# Altium PCB breadboardPlugin.PcbDoc
Units mil, origin at the board's own origin, x right, y up, seen from the top; angles counter-clockwise.
Board outline 2047.24 x 984.25 mil, 2 copper layers (Top Layer, Bottom Layer); 68 components, 30 nets, 189 pads, 58 vias.
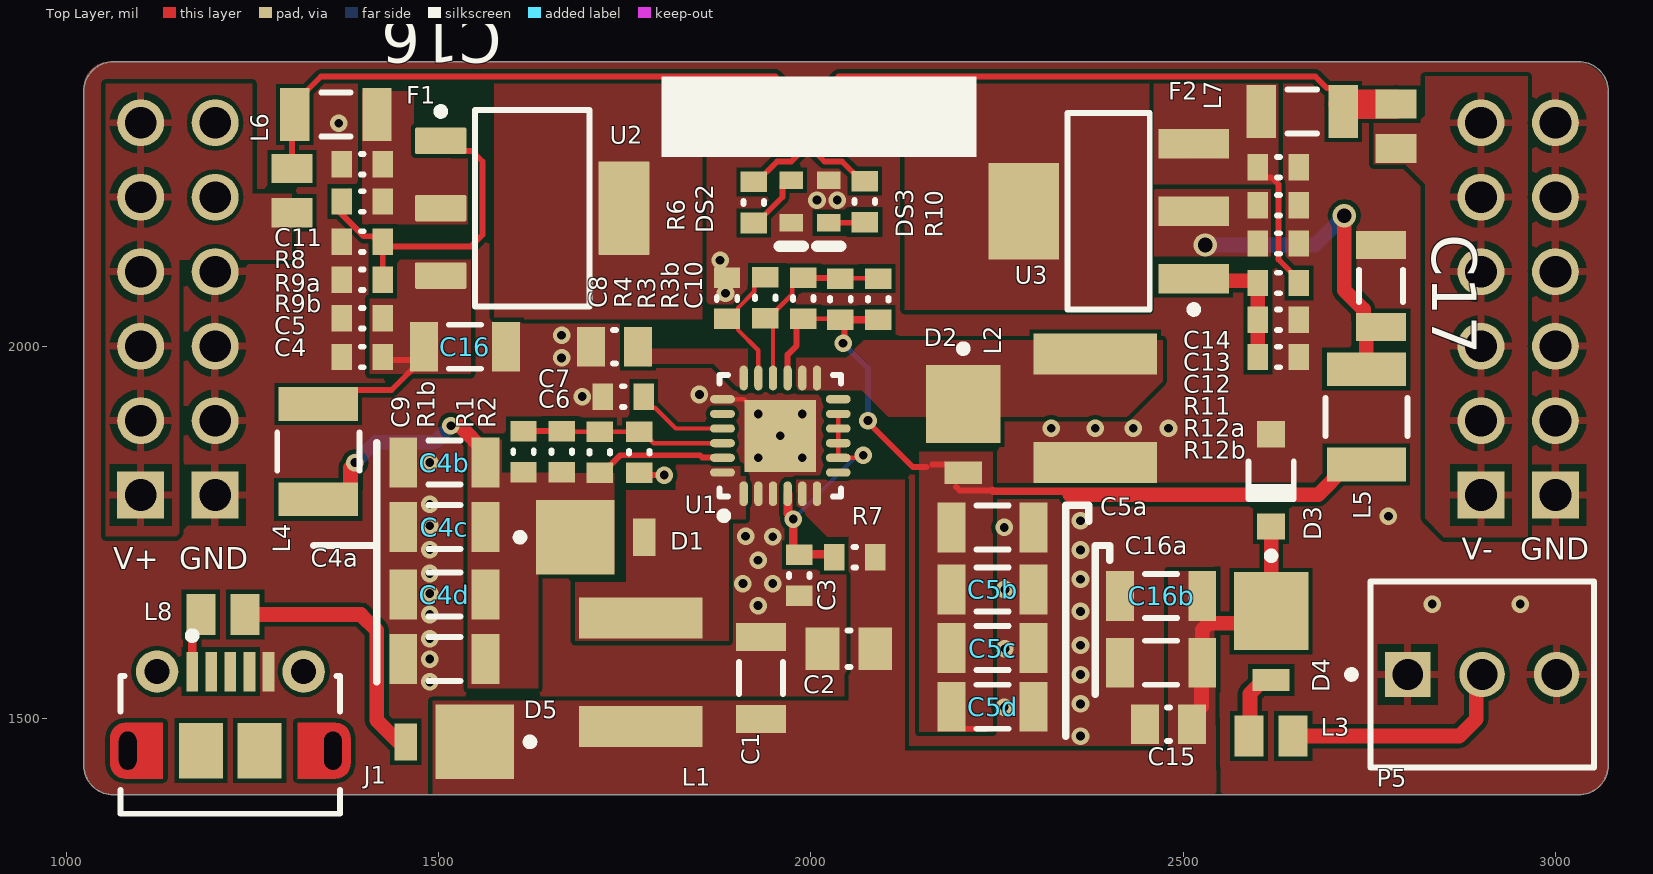
[diagram p0: Top Layer view]
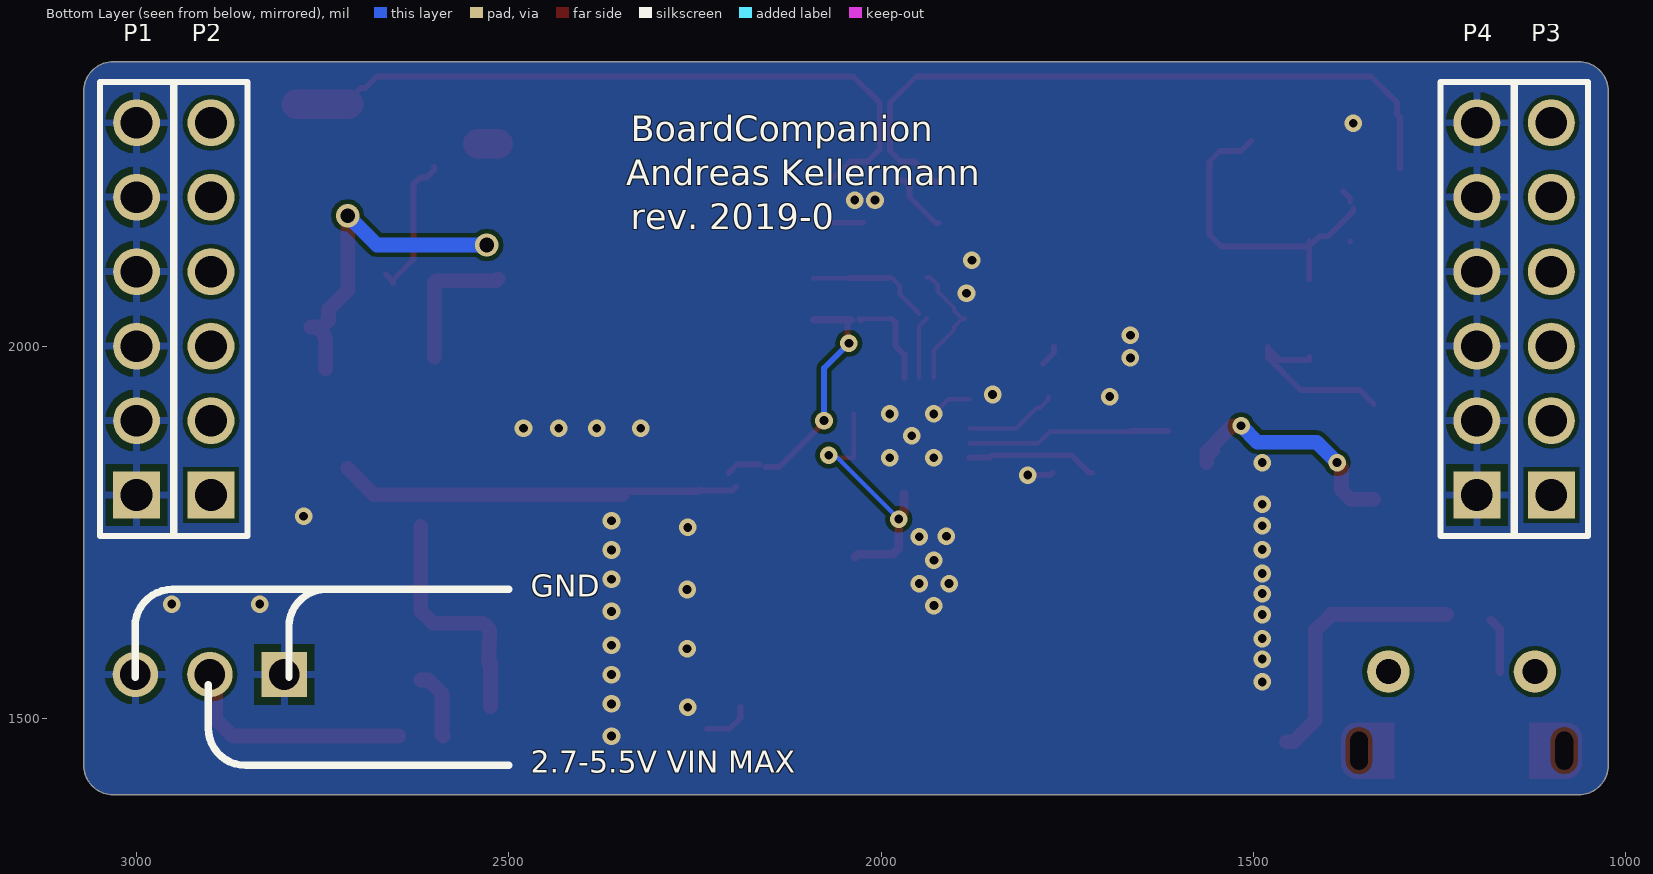
[diagram p1: Bottom Layer view, seen from below]
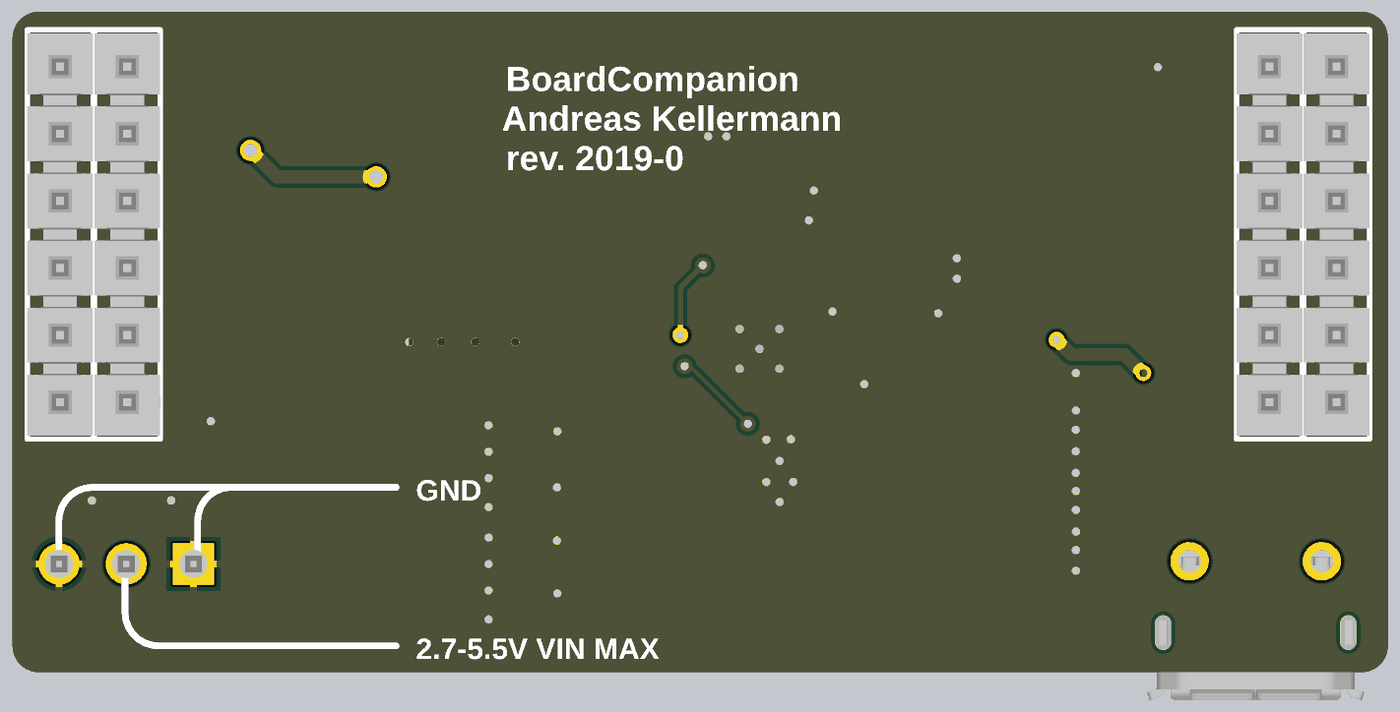
[diagram p2: 3D render of the assembled board from below, using the file's embedded part models]

## Layer stack, top to bottom
Top Solder: solder mask 0.4, Solder Resist, Dk 3.5
Top Layer: signal copper 1.4
Dielectric 1: dielectric 12.6, FR-4, Dk 4.8
Bottom Layer: signal copper 1.4
Bottom Solder: solder mask 0.4, Solder Resist, Dk 3.5

## Board outline
1062.99,1397.64 cw(c1062.99,1437.01) 1023.62,1437.01 1023.62,2342.52 cw(c1062.99,2342.52) 1062.99,2381.89 3031.5,2381.89 cw(c3031.5,2342.52) 3070.87,2342.52 3070.87,1437.01 cw(c3031.5,1437.01) 3031.5,1397.64

## Design rules (kind name [scope] priority, off if disabled: settings)
Clearance [All] p1: gap=5.91 ignorepadtopadclearanceinfootprint=FALSE
PolygonConnect [All] p1: thpad.connectstyle=Relief thpad.reliefconductorwidth=10 thpad.reliefentries=4 thpad.polygonreliefangle="90 Angle" thpad.airgapwidth=10 smdpad.connectstyle=Direct smdpad.reliefconductorwidth=10 smdpad.reliefentries=4 smdpad.polygonreliefangle="90 Angle" smdpad.airgapwidth=10 via.connectstyle=Direct via.reliefconductorwidth=10 via.reliefentries=4 via.polygonreliefangle="90 Angle" via.airgapwidth=10
RoomDefinition RR? [InComponentClass('RR?')] p1: confinementstyle=ConfineIn formatcopy=TRUE lockcomponents=FALSE outline 0,0 2000,0 2000,1000 0,1000
RoomDefinition main [InComponentClass('main')] p2: confinementstyle=ConfineIn formatcopy=TRUE lockcomponents=FALSE outline 3120.07,1466.53 3523.61,1466.53 3523.61,1663.38 3120.07,1663.38
RoutingVias [All] p1: holewidth=28 width=50 viastyle="Through Hole" minholewidth=11.81 minwidth=23.62 maxholewidth=28 maxwidth=50
SolderMaskExpansion [All] p1: expansion=4
Width [All] p1: maxlimit=196.85 minlimit=5.91 preferedwidth=11.81
30 further rules are at their usual default settings.

## Classes and differential pairs
component class RR?: C1 C2 C3 C4a C4b C4c C4d C5a C5b C5c C5d C6 C7 C8 C9 C10 D1 D2 L1 L2 R1 R1b R2 R3 R3b R4 R7 U1
component class main: C4 C5 C11 C12 C13 C14 C15 C16 C16a C16b C17 D3 D4 D5 DS2 DS3 F1 F2 J1 L3 L4 L5 L6 L7 L8 P1 P2 P3 P4 P5 R6 R8 R9a R9b R10 R11 R12a R12b U2 U3

## Components (designator, comment, footprint, x,y, rotation, side; value= is the part's Value field where it differs from the comment)
C1 "4.7uF" CAPC1206(3216)190_L 1933.07,1554.33 r270 top
C2 "4.7uF 0805" CAPC0805(2012)155_N 2051.18,1593.7 r0 top value=4.7uF
C3 "100nF" CAPC0603(1608)100_L 1984.25,1692.13 r90 top
C4 "1uF" CAPC0603(1608)100_L 1397.64,1985.48 r0 top value=100nF
C4a "4.7uF" CAPC1206(3216)190_L 1507.87,1579.76 r0 top
C4b "4.7uF" CAPC1206(3216)190_L 1507.87,1843.54 r0 top
C4c "4.7uF" CAPC1206(3216)190_L 1507.87,1756.92 r0 top
C4d "4.7uF" CAPC1206(3216)190_L 1507.87,1666.37 r0 top
C5 "100nF" CAPC0603(1608)100_L 1397.64,2037.4 r0 top
C5a "4.7uF" CAPC1206(3216)190_L 2244.09,1756.52 r180 top
C5b "4.7uF" CAPC1206(3216)190_L 2244.09,1673.23 r180 top
C5c "4.7uF" CAPC1206(3216)190_L 2244.09,1594.49 r180 top
C5d "4.7uF" CAPC1206(3216)190_L 2244.09,1515.75 r180 top
C6 "10nF" CAPC0603(1608)100_L 1748.03,1932.28 r0 top value=100nF
C7 "4.7nF C0G" CAPC0805(2012)75_L 1736.22,1999.21 r0 top value=4.7nF
C8 "220nF" CAPC0603(1608)100_L 1887.43,2064.14 r270 top
C9 "10pF" CAPC0603(1608)100_L 1614.17,1858.27 r270 top value=220nF
C10 "10pF" CAPC0603(1608)100_L 2090.55,2062.99 r270 top value=220nF
C11 "1uF" CAPC0603(1608)100_L 1397.64,2244.09 r0 top value=100nF
C12 "100nF" CAPC0603(1608)100_L 2627.95,2137.8 r180 top
C13 "1uF" CAPC0603(1608)100_L 2627.95,2189.17 r180 top value=100nF
C14 "1uF" CAPC0603(1608)100_L 2627.95,2240.43 r180 top value=100nF
C15 "MOV" CAPC0805(2012)75_L 2480.31,1492.13 r0 top value=4.7nF
C16 "10uF" CAPC1206(3216)190_L 1535.43,1999.21 r180 top value=4.7uF
C16a "47uF" CAPC1206(3216)190_L 2470.47,1574.8 r0 top value=4.7uF
C16b "47uF" CAPC1206(3216)190_L 2470.47,1664.57 r0 top value=4.7uF
C17 "10uF" CAPC1206(3216)190_L 2765.75,2080.87 r270 top value=4.7uF
D1 "MBRM120LT3" ONSC-POWERMITE-2-457-04_D_V 1736.22,1743.31 r0 top
D2 "MBRM120LT3" ONSC-POWERMITE-2-457-04_D_V 2204.72,1869.85 r270 top
D3 "Q6 - btz52c5v6" DIOD-SOD123-2_V 2618.11,1819.86 r270 top
D4 "MBRM120LT3" ONSC-POWERMITE-2-457-04_D_V 2618.11,1591.68 r270 top
D5 "MBRM120LT3" ONSC-POWERMITE-2-457-04_D_V 1496.06,1468.5 r180 top
DS2 "TLMS1100-GS08" VISH-TLMX1100_V 1973.78,2194.17 r270 top
DS3 "TLMS1100-GS08" VISH-TLMX1100_V 2024.02,2194.17 r270 top
F1 "ptc" LFUS-1206L012WR_V 1362.2,2311.22 r180 top
F2 "ptc" LFUS-1206L012WR_V 2659.84,2314.96 r0 top
J1 "105017-0001" USB-MICRO-B_V 1220.47,1509.84 r0 top
L1 "74404054047" "WE-LQS 5040" 1771.65,1562.2 r90 top
L2 "74404054047" "WE-LQS 5040" 2381.89,1916.54 r90 top
L3 "FBMJ2125HM210NT" INDC2013X105X50LL20T30 2618.11,1476.38 r180 top
L4 "LB3218T1R0M" TDK-B82422A1103K100_V 1338.58,1858.3 r90 top
L5 "LB3218T1R0M" TDK-B82422A1103K100_V 2746.06,1905 r90 top
L6 "FBMJ2125HM210NT" INDC2013X105X50LL20T30 1303.15,2208.86 r90 top
L7 "FBMJ2125HM210NT" INDC2013X105X50LL20T30 2785.83,2295.28 r90 top
L8 "FBMJ2125HM210NT" INDC2013X105X50LL20T30 1210.63,1639.6 r0 top
P1 "PHT-106-01-L-S" SMTC-PHT-106-01-X-S 3000,1800 r90 bottom
P2 "PHT-106-01-L-S" SMTC-PHT-106-01-X-S 2900,1800 r90 bottom
P3 "PHT-106-01-L-S" SMTC-PHT-106-01-X-S 1100,1800 r90 bottom
P4 "PHT-106-01-L-S" SMTC-PHT-106-01-X-S 1200,1800 r90 bottom
P5 "22-23-2031" MOLX-22-23-2031_V 2901.57,1559.06 r0 top
R1 "680k" RESC0603(1608)_L 1716.54,1857.48 r90 top value="100.00 Ohm"
R1b "opt" RESC0603(1608)_L 1665.35,1858.27 r90 top value="100.00 Ohm"
R2 "56k" RESC0603(1608)_L 1769.69,1857.48 r270 top value="100.00 Ohm"
R3 "680k" RESC0603(1608)_L 1989.79,2064.14 r270 top value="100.00 Ohm"
R3b "opt" RESC0603(1608)_L 2039.76,2062.95 r270 top value="100.00 Ohm"
R4 "56k" RESC0603(1608)_L 1938.61,2064.92 r270 top value="100.00 Ohm"
R6 "3.3k" RESC0603(1608)_L 1923.23,2192.91 r270 top value="100.00 Ohm"
R7 "100R" RESC0603(1608)_L 2059.06,1716.54 r0 top value="100.00 Ohm"
R8 "150" RESC0603(1608)_L 1397.64,2194.21 r180 top value="100.00 Ohm"
R9a "1.5k" RESC0603(1608)_L 1397.64,2140.43 r180 top value="100.00 Ohm"
R9b "opt" RESC0603(1608)_L 1397.64,2089.17 r180 top value="100.00 Ohm"
R10 "3.3k" RESC0603(1608)_L 2072.22,2194.17 r270 top value="100.00 Ohm"
R11 "150" RESC0603(1608)_L 2627.95,2084.81 r180 top value="100.00 Ohm"
R12a "1.5k" RESC0603(1608)_L 2627.95,1985.48 r0 top value="100.00 Ohm"
R12b "opt" RESC0603(1608)_L 2627.95,2035.59 r0 top value="100.00 Ohm"
U1 "TPS6513x" TI-RGE24-2450X2450TP_V 1959.06,1879.53 r90 top locked
U2 "LM317AEMP" DCY0004A_N 1625.98,2185.24 r0 top
U3 "LM337IMPX" MP04A_N 2400,2181.1 r180 top

## Footprints (in the part's own frame and the unit in brackets; to place one, negate y for a bottom-side part, rotate by r counter-clockwise, add the part's x,y. Pads: shape width x height; smd on the part's side, far side on the other; paste and mask are expansions set on the pad)
CAPC0603(1608)100_L [mm] "Chip Capacitor, Body 1.6x0.8mm, Height 1.0mm, IPC High Density"
  rect 0.7x0.9 smd: 1(-0.7,0) 2(0.7,0)
  silkscreen extent -0.05,-0.35 0.05,0.35, body extent -0.87,-0.47 0.88,0.48, height 1
CAPC0805(2012)75_L [mm] "Chip Capacitor, Body 2.0x1.2mm, Height 0.75mm, IPC High Density"
  rect 0.95x1.35 smd: 1(-0.8,0) 2(0.8,0)
  silkscreen extent -0.05,-0.58 0.05,0.58, body extent -1.1,-0.72 1.1,0.72, height 0.75
CAPC0805(2012)155_N [mm] "Chip Capacitor, Body 2.0x1.2mm, Height 1.55mm, IPC Medium Density"
  rect 1.15x1.45 smd: 1(-0.9,0) 2(0.9,0)
  silkscreen extent -0.05,-0.62 0.05,0.63, body extent -1.1,-0.72 1.1,0.73, height 1.55
CAPC1206(3216)190_L [mm] "Chip Capacitor, Body 3.2x1.6mm, Height 1.9mm, IPC High Density"
  rect 0.95x1.7 smd: 1(-1.4,0) 2(1.4,0)
  silkscreen extent -0.55,-0.75 0.55,0.75, body extent -1.7,-0.9 1.7,0.9, height 1.9
DCY0004A_N [mm] "SOT223, 4-Leads, Body 6.7x3.7mm, Pitch 2.3mm, IPC Medium Density"
  rrect11% 1.75x0.9 smd: 1(-3.125,2.3) 2(-3.125,0) 3(-3.125,-2.3)
  rrect6% 1.75x3.2 smd: 4(3.125,0)
  silkscreen extent -3.25,-3.35 1.95,3.42, body extent -3.5,-3.25 3.5,3.25, height 1.62
DIOD-SOD123-2_V [mm] "SOD123, 2-Leads, Body 2.7x1.55mm, Height 1.45mm"
  rect 0.9x0.95 smd: 1(-1.575,0) 2(1.575,0)
  silkscreen extent -0.64,-0.83 0.64,0.77, body extent -1.35,-0.77 1.35,0.77, height 1.45
INDC2013X105X50LL20T30 [mm] "Chip Inductor, 2-Leads, Body 2.2x1.45mm, IPC High Density"
  rect 0.99x1.39 smd: 1(-0.755,0) 2(0.755,0)
  body extent -1.1,-0.72 1.1,0.72, height 1.05
LFUS-1206L012WR_V [mm] "SMD, 2-Leads, Body 3.2x1.65mm"
  rect 1x1.8 smd: 1(-1.4,0) 2(1.4,0)
  silkscreen extent -0.5,-0.75 0.5,0.75, body extent -1.6,-0.82 1.6,0.82, height 1.45
MOLX-22-23-2031_V [mm] "CONN, 3-Leads, Body 7.62x6.35mm, Pitch 2.54mm"
  rect 1.55x1.55 hole 1.05: 1(-2.54,0)
  round 1.55 hole 1.05: 2(0,0) 3(2.54,0)
  silkscreen extent -4.58,-3.17 3.81,3.17, body extent -3.73,-3.25 3.73,3.1, height 10.67
MP04A_N [mm] "SOT223, 4-Leads, Body 6.5x3.5mm, Pitch 2.3mm, Lead Span 7mm, IPC Medium Density"
  rect 2.4x1 smd: 1(-2.9,2.3) 2(-2.9,0) 3(-2.9,-2.3)
  rect 2.4x3.3 smd: 4(2.9,0)
  silkscreen extent -3.03,-3.35 1.4,3.47, body extent -1.86,-3.35 1.86,3.35, height 1.8
ONSC-POWERMITE-2-457-04_D_V [mil] "POWERMITE, 2-Leads, Body 1.965x1.9mm"
  rect 105.12x100 smd: 1(-52.56,0)
  rect 30x50 smd: 2(40,0)
  silkscreen extent -132,-5 -122,5, body extent -80,-37 -3,37, height 45
RESC0603(1608)_L [mm] "Chip Resistor, Body 1.6x0.8mm, IPC High Density"
  rect 0.7x0.9 smd: 1(-0.7,0) 2(0.7,0)
  silkscreen extent -0.05,-0.35 0.05,0.35, body extent -0.85,-0.47 0.85,0.47, height 0.6
SMTC-PHT-106-01-X-S [mm] "Press Fit Socket Assembly, 1x6 Pins, Vertical, 2.54mm Pitch, Male"
  rect 1.6x1.6 hole 1.081: 1(0,0)
  round 1.6 hole 1.081: 2(2.54,0) 3(5.08,0) 4(7.62,0) 5(10.16,0) 6(12.7,0)
  silkscreen extent -1.4,-1.24 14.1,1.24, body extent -1.26,-1.25 13.96,1.25, height 8.38
TDK-B82422A1103K100_V [mm] "Molded Inductor, 2-Leads, Body 3.5x2.8mm"
  rect 1.15x2.7 smd: 1(-1.625,0) 2(1.625,0)
  silkscreen extent -0.65,-1.4 0.65,1.4, body extent -1.97,-1.4 1.97,1.4, height 2.1
TI-RGE24-2450X2450TP_V [mm] "QFN, 24-Leads, Body 4x4mm, Pitch 0.5mm, Thermal Pad 2.45x2.45mm"
  oval 0.85x0.28 smd: 1(-1.975,1.25) 2(-1.975,0.75) 3(-1.975,0.25) 4(-1.975,-0.25) 5(-1.975,-0.75) 6(-1.975,-1.25) 13(1.975,-1.25) 14(1.975,-0.75) 15(1.975,-0.25) 16(1.975,0.25) 17(1.975,0.75) 18(1.975,1.25)
  oval 0.28x0.85 smd: 7(-1.25,-1.975) 8(-0.75,-1.975) 9(-0.25,-1.975) 10(0.25,-1.975) 11(0.75,-1.975) 12(1.25,-1.975) 19(1.25,1.975) 20(0.75,1.975) 21(0.25,1.975) 22(-0.25,1.975) 23(-0.75,1.975) 24(-1.25,1.975)
  rect 2.45x2.45 smd: 25(0,0)
  silkscreen extent -2.85,-2.07 2.07,2.07, body extent -2,-2 2,2, height 1
USB-MICRO-B_V [mm] "USB, MICRO B, Body 7.491x4.695 mm, Pitch 0.65 mm"
  rect 0.4x1.35 smd: 1(-1.3,1.35) 2(-0.65,1.35) 3(0,1.35) 4(0.65,1.35) 5(1.3,1.35)
  round 1.45 hole 0.85: 6(-2.5,1.35) 7(2.5,1.35)
  rrect50% 0x0 hole 0.6 slot 1.3 at 90 deg: 8(-3.5,-1.35) 11(3.5,-1.35)
  rect 1.5x1.9 smd: 9(-1,-1.35) 10(1,-1.35)
  Top Layer circle w0.5: c-3.6,-1.8 r0.25
  Top Layer circle w0.5: c-3.6,-0.9 r0.25
  Top Layer circle w0.5: c3.6,-1.8 r0.25
  Top Layer circle w0.5: c3.6,-0.9 r0.25
  Top Layer region: -3.6,-1.8 -3.6,-0.9 -4.1,-0.9 -4.1,-1.8
  Top Layer region: 3.6,-0.9 3.6,-1.8 4.1,-1.8 4.1,-0.9
  Top Layer region: 2.3,-0.4 2.3,-2.3 3.6,-2.3 3.6,-0.4
  Top Layer region: -2.3,-2.3 -2.3,-0.4 -3.6,-0.4 -3.6,-2.3
  silkscreen extent -3.75,-3.5 3.75,2.7, body extent -4.1,-3.9 4.1,1.5, height 2.67
VISH-TLMX1100_V [mm] "SMD, 2-Leads, Body 1.6x0.8mm"
  rect 0.6x0.8 smd: 1(-0.725,0) 2(0.725,0)
  silkscreen extent 1.53,-0.4 1.53,0.4, body extent -0.8,-0.4 0.8,0.4, height 0.65
"WE-LQS 5040" [mm] "SMD Power Inductor, 2-Leads, Body 5.0x5.0mm"
  rect 1.4x4.2 smd: 1(-1.85,0) 2(1.85,0)
  body extent -2.5,-2.5 2.5,2.5, height 3.99

## Part data
C1 C4a C4b C4c C4d C5a C5b C5c C5d C16 C17: library part CMP-1037-04919-1, "CAP 4.7uF 25V ±20% 1206 (3216 Metric) Thickness 1.9mm SMD", Case-EIA=1206, Case-Metric=3216, Rated Voltage="25 V", Tolerance=±20%, Max Thickness="1.9 mm", Technology=SMT
C2: library part CMP-1036-04882-1, "CAP 4.7uF 10V ±10% 0805 (2012 Metric) Thickness 1.55mm SMD", Case-EIA=0805, Case-Metric=2012, Rated Voltage="10 V", Tolerance=±10%, Max Thickness="1.55 mm", Technology=SMT
C3 C5 C6 C12: library part CMP-1035-02589-1, "CAP 100nF 25V ±20% 0603 (1608 Metric) Thickness 1mm SMD", Case-EIA=0603, Case-Metric=1608, Rated Voltage="25 V", Tolerance=±20%, Max Thickness="1 mm", Technology=SMT
C4 C11 C13 C14: library part CMP-1035-02589-1, "CAP 1uF 25V ±20% 0603 (1608 Metric) Thickness 1mm SMD", Case-EIA=0603, Case-Metric=1608, Rated Voltage="25 V", Tolerance=±20%, Max Thickness="1 mm", Technology=SMT
C7: library part CMP-1036-03595-1, "CAP 4.7nF 50V ±20% 0805 (2012 Metric) Thickness 0.75mm SMD", Case-EIA=0805, Case-Metric=2012, Rated Voltage="50 V", Tolerance=±20%, Max Thickness="0.75 mm", Technology=SMT
C8: library part CMP-1035-02639-1, "CAP 220nF 10V ±5% 0603 (1608 Metric) Thickness 1mm SMD", Case-EIA=0603, Case-Metric=1608, Rated Voltage="10 V", Tolerance=±5%, Max Thickness="1 mm", Technology=SMT
C9 C10: library part CMP-1035-02639-1, Case-EIA=0603, Case-Metric=1608, Rated Voltage="10 V", Tolerance=±5%, Max Thickness="1 mm", Technology=SMT
C15: library part CMP-1036-03595-1, "MOV 0805", Case-EIA=0805, Case-Metric=2012, Rated Voltage="50 V", Tolerance=±20%, Max Thickness="0.75 mm", Technology=SMT
C16a C16b: library part CMP-1037-04919-1, "CAP 47uF 10V ±20% 1206 X5R", Case-EIA=1206, Case-Metric=3216, Rated Voltage="25 V", Tolerance=±20%, Max Thickness="1.9 mm", Technology=SMT
D1 D2 D4 D5: library part CMP-1055-00282-1, "Schottky Power Rectifier, 2-Pin Powermite, Tape and Reel", Manufacturer="On Semiconductor", ComponentLink1Description="Manufacturer URL", ComponentLink1URL=http://www.onsemi.com/, ComponentLink2Description=Datasheet, ComponentLink2URL=http://www.onsemi.cn/pub_link/Collateral/MBRM120L-D.PDF, ComponentLink3Description="Package Specification", ComponentLink3URL=http://www.onsemi.com/pub_link/Collateral/457-04.PDF, Configuration=Single, DatasheetVersion="Rev. 7", IFSM Max (A)=50, Mounting Technology="Surface Mount", Note1=0, PackageDescription="2-Pin POWERMITE, Body 1.965 x 1.9 mm", PackageReference=POWERMITE-2-457-04, PackageVersion="Rev. F, 05/2013", Packing="Tape and Reel", PartNumber=MBRM120LT3, RoHS=FALSE
D3: library part CMP-0860-00001-1, "Zener Diode 500mw, 5.6v", Manufacturer="Diodes Inc", Maximum Reverse Current="0.1 uA", Operating Temperature="-65 to 150 degC", PartNumber=BZT52C16-7-F, Power Max="500 mW", Voltage Zener="16 V Typ.", ComponentLink1Description="Manufacturer URL", ComponentLink1URL=http://www.diodes.com/, ComponentLink2Description=Datasheet, ComponentLink2URL=http://www.diodes.com/datasheets/ds18004.pdf, ComponentLink3Description="Package Specification", ComponentLink3URL=http://www.diodes.com/datasheets/ap02002.pdf, DatasheetVersion="Rev. 37-2", Maximum Zener Impedance f="1 kHz ZZK=200 Ohm", Mounting Technology="Surface Mount", PackageDescription="2-Pin SOD123, Body 2.7 x 1.55 mm, Height 1.45 mm", PackageReference=SOD123, PackageVersion="Rev. 79", Packing="Tape and Reel", RoHS=TRUE, Tol V="5.56% Typ."
DS2 DS3: library part CMP-1666-00027-1, "LED, RED, 2.1 V, -40 to 100 degC, 2-Pin SMD (0603), RoHS, Tape and Reel", Capacitance="12 pF", Case/Package=0603, Case Code (Metric)=1608, Max Operating Temperature=125degC, Min Operating Temperature=-55degC, Package Quantity=4000, Resistance="100000000000 Ohm", Tolerance=5%, Type (Capacitors)=C0G, Voltage Rating="50 V", Case Code (Imperial)=0603, ComponentLink1Description="Manufacturer URL", ComponentLink1URL=http://www.vishay.com/, ComponentLink2Description=Datasheet, ComponentLink2URL=http://www.vishay.com/docs/83173/tlmb1100.pdf, DatasheetVersion="Rev. 2.7, 03/2016", Height="0.8 mm", Length="1.6 mm", Mount="Surface Mount", PackageDescription="2-Pin Surface Mount Device, Body 1.6 x 0.8 mm", PackageReference=TLMX1100, Packaging="Tape and Reel", Pins=2, Radiation Hardening=No, REACH SVHC="No SVHC", RoHSCompliant=True, Voltage Rating (DC)="50 V", Width="0.8 mm"
F1 F2: library part CMP-2000-05470-1, "200mA PTC", Hold Current [Ih]=0.125A, Manufacturer=Littelfuse, Operating Temp Range=-40to+85°C, Package Description="2-Pin Surface Mount Device, Body 3.2 x 1.65 mm", Package Reference=1206, Trip Current=0.29A, Working Voltage-Max=30V, Datasheet URL=https://datasheet.ciiva.com/26787/1206l012wr-26787215.pdf, Datasheet Version=04/2012, Manufacturer URL=http://www.littelfuse.com/, Mounting Technology=SurfaceMount, Size=1206
J1: library part CMP-2000-05827-1, "Micro-USB B Receptacle, Right Angle, Bottom Mount, Surface Mount, with Solder Tabs, -30 to 85 degC, 5-Pin USB, RoHS, Tape and Reel", Manufacturer=Molex, Package Description="5-Leads USB, Micro B, Body 7.5 x 5 mm, Pitch 0.65 mm", Package Reference=MICRO-B, Package Version="Rev. F, 12/2012", Standard Package=1, Voltage - Max=30V, 3D Model=105017-0001.stp, Catalog Drawings=1050170001, Category=Connectors,Interconnects, Circuits=5, Connector Type=USB-microB, Datasheet URL=http://www.molex.com/elqNow/elqRedir.htm?ref=http://www.molex.com/webdocs/datasheets/pdf/en-us/1050170001_IO_CONNECTORS.pdf, Datasheet Version=03/2016, Family=USB,DVI,HDMIConnectors, Featured Product=Micro-USBConnectorsUSBConnectors, Features=Shielded,SolderRetention, Gender=Receptacle, Ingress Protection=-, Manufacturer URL=http://www.molex.com/, Mating Products=WM17145-ND-CABLEMICROUSBBTOSTDA1.0MWM17147-ND-CABLEMICROUSBBTOSTDA2.0MWM17146-ND-CABLEMICROUSBBTOSTDA1.5M, Mounting Technology=SurfaceMount, Mounting Type=BoardCutout,SurfaceMount,RightAngle, Number of Contacts=5, Online Catalog=Molex-MicroUSB, Other Names=WM1399DKR, Package URL=http://www.molex.com/pdm_docs/sd/1050170001_sd.pdf, Packaging=Digi-Reel®, PCN Assembly/Origin=ResinSupplier21/Oct/2015, RoHS Information=1050170001CertofCompliance, Series=-, Specifications=-
L1 L2: library part CMP-1354-00047-1, "WE-LQS SMD Power Inductor, L=4.7 µH", Inductance="4.7 µH", Manufacturer="Wuerth Elektronik", ComponentLink1Description="Manufacturer URL", ComponentLink1URL=http://www.we-online.com, ComponentLink2Description=Datasheet, ComponentLink2URL=http://katalog.we-online.de/pbs/datasheet/74404054047.pdf, PackageReference="WE-LQS 5040", PartNumber=74404054047
L3 L6 L7 L8: library part CMP-1660-00003-1, "Chip Inductor, 21 Ohm, +/- 30%, 6 A, -40 to 125 degC, 0805 (2012 Metric), RoHS, Tape and Reel", Case\Package=0805, Case Code (Metric)=2012, Current Rating="6 A", Max Operating Temperature="125 degC", Min Operating Temperature="-40 degC", Package Quantity=1, Resistance="4 mohm", Tolerance=30%, Case Code (Imperial)=0805, ComponentLink1Description="Manufacturer URL", ComponentLink1URL=http://www.t-yuden.com/, ComponentLink2Description=Datasheet, ComponentLink2URL=http://ds.yuden.co.jp/TYCOMPAS/ut/detail.do?productNo=FBMJ2125HM210NT&fileName=FBMJ2125HM210NT_SS&mode=specSheetDownload, Core Material=Ferrite, DatasheetVersion=08/2016, Height="0.85 mm", Impedance="21 Ohm", Length="2 mm", Max Current Rating="6 A", Mount="Surface Mount", Mounting Technology="Surface Mount", PackageDescription="2-Pin Surface Mount Device, Body 2 x 1.25 mm", PackageReference=0805, Packaging="Tape and Reel", REACH SVHC=Unknown, RoHSCompliant=true, Width="1.25 mm"
L4 L5: library part CMP-2000-05912-1, "FIXED IND 1UH 1.075A 60 MOHM SMD", Current - Saturation=-, Current Rating=180mA, DC Resistance (DCR)=1.6OhmMax, Frequency - Self Resonant=25MHz, Frequency - Test=1MHz, Inductance=10µH, Manufacturer=EPCOS-(TDK), Package / Case=1210(3225Metric), Package Description="2-Pin Surface Mount Device, Body 3.2 x 2.5 mm", Package Reference=B82422A1103K100, Q @ Freq=27@2.52MHz, Ratings=AEC-Q200, Tolerance=±10%, Category=Inductors,Coils,Chokes, Datasheet URL=https://en.tdk.eu/inf/30/db/ind_2008/b82422a_100.pdf, Datasheet Version=10/2012, Family=FixedInductors, Manufacturer URL=http://www.tdk.com/, Material - Core=Ferrite, Mounting Technology=SurfaceMount, Mounting Type=SurfaceMount, Operating Temperature=-, Packaging=CutTape(CT), Series=SIMID, Shielding=Unshielded, Type=Wirewound
P1 P2 P3 P4: library part CMP-1024-00187-1, "Press Fit Header, Through-hole, Vertical, -55 to 125 degC, 2.54 mm Pitch, 6-Pin, Male, RoHS", Manufacturer=Samtec, Temperature Range="-55 to 125 degC", ComponentLink1Description="Manufacturer URL", ComponentLink1URL=http://www.samtec.com, ComponentLink2Description=Datasheet, ComponentLink2URL=http://www.samtec.com/documents/webfiles/pdf/pht.pdf, ComponentLink3Description="Package Specification", ComponentLink3URL=http://www.samtec.com/documents/webfiles/cpdf/PHT-1XX-XX-X-X-XXX-MKT.pdf, DatasheetVersion=F-214, Mounting Technology=Through-hole, Orientation=Vertical, PackageDescription=".100 Press Fit Socket Assembly", PackageReference=PHT-106-01-X-S, PackageVersion="J, 9/2009", PartNumber=PHT-106-01-L-S, Pitch="2.54 mm", RoHS=True
P5: library part CMP-2000-05242-1, "Male Header, Pitch 2.54 mm, 1 x 3 Position, Height 8.18 mm, Tail Length 3.56 mm, RoHS, Bulk", Current Rating=4A, Manufacturer=Molex, Voltage Rating=250V, =0022232031A-6373-03A102, Brand=Molex, Contact Gender=Pin(Male), Contact material=Brass, Contact Plating=Tin, Datasheet URL=https://datasheet.ciiva.com/19472/232274-19472863.pdf, Datasheet Version=Sep-01, Factory Pack Quantity=16000, Housing material=Nylon, Manufacturer URL=http://www.molex.com/, Mounting Angle=Vertical, Mounting Style=ThroughHole, Number of Positions=3Position, Number of Rows=1Row, Packaging=Bulk, Pitch=2.54mm, Product=Headers, Product Category=Headers&WireHousings, RoHS=Details, Series=6373, Termination Style=ThroughHole, Tradename=KK, Type=Locking
R1 R1b R2 R3 R3b R4 R6 R8 R9a R9b R10 R11 R12a R12b: library part CMP-1012-00397-1, Case-EIA=0603, Case-Metric=1608, Power="0.1 W", Tolerance="1 %", Technology=SMT
R7: library part CMP-1012-00397-1, "100R 0.1W 1% 0603 (1608 Metric)  SMD", Case-EIA=0603, Case-Metric=1608, Power="0.1 W", Tolerance="1 %", Technology=SMT
U1: library part CMP-0388-00544-1, "TPS65130 or TPS65131 Postive and Negative Output DC-DC Converter", Manufacturer="Texas Instruments", PartNumber=TPS65130RGET, Rating=Catalog, Switching Frequency(Typ)(kHz)=1400, Code_JEDEC=MO-220, ComponentLink1Description="Manufacturer URL", ComponentLink1URL=http://www.ti.com/, ComponentLink2Description=Datasheet, ComponentLink2URL=http://www.ti.com/general/docs/lit/getliterature.tsp?genericPartNumber=TPS65130&fileType=pdf, ComponentLink3Description="Package Specification", ComponentLink3URL=http://www.ti.com/litv/pdf/mpqf124f, DatasheetVersion=SLVS493B, Eco-Plan="Green (RoHS & no Sb/Br)", Iq(Typ)(mA)=0.5, Mounting Technology="Surface Mount", PackageDescription="24-Pin Plastic Flat Pack, Body 4 x 4 mm, 0.5 mm Pitch", PackageReference=RGE24-2450X2450TP, PackageVersion=4204104/G, SubFamily="LCD/OLED Display Bias Solutions", Topology="Boost, Inverting Buck/Boost", Vin(Max)(V)=5.5, Vin(Min)(V)=2.7
U2: library part CMP-0062-01709-3, "3-Terminal Adjustable Regulator, 4-pin SOT-223", Manufacturer="Texas Instruments", PackageTopMarking=XYTT*N07A, PowerWise=N, Code_IPC=SOT223-4, Code_JEDEC=TO-261-AA, ComponentLink1Description="Datasheet URL", ComponentLink1URL=http://www.ti.com/general/docs/lit/getliterature.tsp?genericPartNumber=LM317-N&fileType=pdf, CompType="LDO IC", PackageDescription="Molded SOT-223, 6.50 x 3.56 x 1.6mm Body, 4 Lead, 2.3mm Pitch", PackageReference=DCY0004A, PinCount=4, RoHS=N
U3: library part CMP-0062-01833-1, "3-Terminal Adjustable Negative Regulator, 4-pin SOT-223", Manufacturer="National Semiconductor", PackageTopMarking=XYTT*N02A, PowerWise=N, Code_IPC=SOT223-4, Code_JEDEC=TO-261-AA, CompType="LDO IC", DatasheetVersion=Nov-2004, PackageDescription="Molded SOT-223, 6.50 x 3.56 x 1.6mm Body, 4 Lead, 2.3mm Pitch", PackageReference=MP04A, PackageVersion="revB, Apr-2003", PinCount=4, RoHS=N

## Via types
v1: diameter 23.62, hole 11.81, Top Layer to Bottom Layer, tented both sides, 53 vias
v2: diameter 23.62, hole 11.81, Top Layer to Bottom Layer, 3 vias
v3: diameter 31.5, hole 19.68, Top Layer to Bottom Layer, 2 vias

## Nets (pads, with @x,y where several pads share a name; then routed paths per layer and width w, separated by ;. In a path a pad name is that pad's centre, name@x,y a point inside that pad or via, vN(x,y) a via of type N, cw(c..) or ccw(c..) an arc to the next point about the centre after c; other vN are vias at no path point)
+12V: C4a.2 C4b.2 C4c.2 C4d.2 C9.2 D1.1 L4.1 R1.1 R1b.1 U1.23 | length 509.2
  Top Layer w7.87: C4b.2@1548.23,1858.3 C4b.2 ; R1.1 1720.47,1829.92 1744.09,1853.54 1851.18,1853.54 1854.12,1850.6 1880.7,1850.6 U1.23
  Top Layer w19.68: L4.1 1369.09,1794.32 1381.89,1807.12 1381.89,1836.57 1387.8,1842.47 v2(1387.8,1843.54) ; v2(1516.73,1892.99) 1528.3,1892.99 1562.99,1858.3 C4b.2
  Bottom Layer w19.68: v2(1387.8,1843.54) 1415.35,1871.1 1494.84,1871.1 v2(1516.73,1892.99)
-12V: C5a.2 C5b.2 C5c.2 C5d.2 C10.2 D2.2 L5.1 R3.2 R3b.2 U1.15 | length 1104.5
  Top Layer w5.91: R3.2@1985.85,2036.58 R3.2 R3b.2@2029.16,2036.58
  Top Layer w7.87: U1.15 1968.9,1988.58 1981,2000.69 1981,2031.73 R3.2@1985.85,2036.58 ; R3b.2@2027.19,2034.61 R3b.2@2029.16,2036.58 ; v1(2043.31,2003.94) 2045.28,2005.91 R3b.2@2045.28,2035.4 ; v2(2076.77,1900) 2076.77,1897.9 2137.15,1837.52 2155.51,1837.52 ; 2163.03,1840.91 2193.66,1840.91 D2.2 ; C5d.2 2188.98,1500.98 2203.74,1486.22 2234.25,1486.22 ; 2194.88,1811.02 2199.61,1806.3 2244.09,1806.3
  Top Layer w9.84: R3b.2 C10.2@2090.53,2035.41 ; 2244.09,1806.3 2245.08,1805.32 2347.91,1805.32 2362.2,1805.32
  Top Layer w19.68: 2347.91,1800.39 2362.2,1800.39 2681.11,1800.39 L5.1@2716.54,1835.82
  Bottom Layer w7.87: v1(2043.31,2003.94) 2076.77,1970.47 v2(2076.77,1900)
CT1: U2.4
CT2: U3.4
GND: C1.1 C2.1 C3.1 C4.1 C4a.1 C4b.1 C4c.1 C4d.1 C5.1 C5a.1 C5b.1 C5c.1 C5d.1 C6.1 C7.1 C8.1 C11.1 C12.1 C13.1 C14.1 C15.1 C16.1 C16a.1 C16b.1 C17.1 D3.1 DS2.2 DS3.1 J1.5 L2.1 P1.1 P1.2 P1.3 P1.4 P1.5 P1.6 P4.1 P4.2 P4.3 P4.4 P4.5 P4.6 P5.1 P5.3 R2.2 R9a.2 R9b.2 R12a.2 R12b.2 U1.2 U1.3 U1.19 U1.25 | length 91.2
  Top Layer w5.91: U1.19 1909.84,1928.74 v1(1929.53,1909.06)
  Top Layer w7.87: R2.2 1772.83,1826.77 v1(1803.15,1826.77)
  other v1: 2362.2,1476.38 2259.84,1515.18 2362.2,1519.49 1488.19,1549.05 2362.2,1558.86 1488.19,1579.76 2260.63,1593.7 2362.2,1598.23 1488.19,1607.32 1488.19,1639.6 2362.2,1643.7 1929.13,1651.57 2834.64,1653.54 2952.76,1653.54 1488.19,1667.74 2260.63,1673.23 1908.81,1681.1 1948.82,1681.1 2362.2,1686.81 1488.19,1694.72 1929.13,1712.6 2362.2,1726.18 1488.19,1726.82 1948.82,1744.09 1912.45,1744.68 2259.84,1756.52 1488.19,1758.9 2362.2,1765.55 2775.59,1771.65 1488.19,1787.75 1488.19,1843.54 1929.53,1850 1988.58,1850 1959.06,1879.53 2322.83,1889.76 2381.89,1889.76 2433.07,1889.76 2480.31,1889.76 1988.58,1909.06 1692.91,1932.28 1850.39,1935.04 1665.35,1984.25 1665.35,2014.57 1885.46,2071.03 1878.18,2115.45 2008.27,2196.14 2035.43,2196.14 1366.14,2299.21
NetC1_2: C1.2 C2.2 C15.2 C16a.2 C16b.2 D3.2 D4.1 D5.1 L1.1 R7.2 U1.5 U1.6 | length 318.3
  Top Layer w19.68: C15.2@2524.61,1515.75 C16a.2@2524.61,1574.8 ; C16a.2@2525.59,1604.33 2525.59,1619.09 2534.45,1627.95 2601.82,1627.95 D4.1 D3.2 ; C16a.2@2526.57,1603.35 2526.57,1576.77 C16a.2@2527.56,1575.79
NetC3_2: C3.2 R7.1 U1.4 U1.8 U1.9 U1.10 U1.11 | length 364.2
  Top Layer w5.91: 1976.38,1755.91 v1(1976.38,1767.72) ; U1.11 U1.10 U1.9 U1.8 2066.88,1850 v1(2070.42,1853.54)
  Top Layer w11.81: U1.4 1969.29,1801.38 1969.29,1774.8 v1(1976.38,1767.72) ; 1976.38,1755.91 1976.38,1728.35 1984.25,1720.47 2031.5,1720.47 R7.1@2035.43,1716.54
  Bottom Layer w5.91: v1(1976.38,1767.72) 2058.66,1850 2066.96,1850 v1(2070.42,1853.54) v1(2070.42,1853.54)
NetC4_2: C4.2 C5.2 C16.2 L4.2 U2.3 | length 247.4
  Top Layer w7.87: L4.2 1357.28,1940.98 1436.84,1940.98 1480.32,1984.45 C16.2@1480.32,1996.31 ; C4.2 1425.2,1981.54 1465.55,1981.54 C16.2@1480.32,1996.31 ; C16.2 C16.2@1480.32,1996.31
NetC6_2: C6.2 U1.21 | length 125.8
  Top Layer w5.91: C6.2 1775.59,1928.35 1786.42,1917.52 1790.35,1917.52 1818.5,1889.37 U1.21
NetC7_2: C7.2 U1.18 | length 28.8
  Top Layer w7.87: C7.2 1767.72,1991.34 C7.2@1782.48,1976.57
NetC8_2: C8.2 R4.1 U1.17 | length 176.8
  Top Layer w5.91: C8.2 C8.2@1891.37,2036.58 ; U1.17 1929.53,1994.48 1902.19,2021.81 1902.19,2025.75 C8.2@1891.37,2036.58 ; R4.1 1934.67,2092.48 1923.85,2081.66 1923.85,2072.99 1902.19,2051.34 1902.19,2047.4 C8.2@1891.37,2036.58
NetC9_1: C9.1 R1.2 R1b.2 R2.1 U1.22 | length 273.8
  Top Layer w5.91: R1b.2@1665.35,1885.04 R1.2 1773.62,1885.04 1788.98,1869.69 U1.22
  Top Layer w7.87: C9.1 1664.57,1885.83 R1b.2@1665.35,1885.04
NetC10_1: C10.1 R3.1 R3b.1 R4.2 U1.16 | length 254.2
  Top Layer w5.91: R4.2 1949.21,2026.76 U1.16 ; R4.2@1949.21,2043.24 1948.82,2043.64 1975.03,2069.84 1975.03,2080.87 1985.85,2091.7 R3.1 ; R3b.1@2040.97,2091.7 2041.35,2091.31 C10.1@2091.51,2091.31
  Top Layer w7.87: R3.1 R3b.1@2040.97,2091.7
NetC11_2: C11.2 F1.1 R8.1 U2.2
NetC12_2: C12.2 C13.2 C17.2 L5.2 U3.2 | length 449.8
  Top Layer w19.68: v3(2716.54,2175.2) 2716.54,2074.96 2742.13,2049.37 2742.13,2034.61 2750.98,2025.75 C17.2 ccw(c2765.75,2006.07) 2746.06,2006.07 L5.2
  Bottom Layer w19.68: v3(2529.53,2135.83) 2677.17,2135.83 v3(2716.54,2175.2)
NetC14_2: C14.2 F2.1 R11.1 U3.3 | length 224.9
  Top Layer w7.87: C14.2 2600.39,2236.49 2610.24,2226.65 2618.68,2226.65 2627.95,2217.38 2627.95,2116.3 2655.51,2088.74 R11.1@2655.51,2086.61 ; R11.1 R11.1@2655.51,2086.61 ; R11.1@2665.35,2096.46 R11.1@2655.51,2086.61
  Top Layer w39.37: U3.3 U3.3@2541.73,2271.65
NetD1_2: D1.2 L1.2 U1.1 U1.24
NetD2_1: D2.1 L2.2 U1.13 U1.14
NetD4_2: D4.2 L3.2 | length 93.5
  Top Layer w19.68: L3.2 2589.7,1477.69 2589.7,1533.27 2608.11,1551.68 D4.2
NetD5_2: D5.2 L8.2 | length 357.4
  Top Layer w19.68: L8.2 1395.83,1639.6 1417.13,1618.31 1417.13,1497.44 1446.06,1468.5 D5.2
NetDS2_1: DS2.1 R6.2 | length 82.9
  Top Layer w7.87: R6.2 1927.17,2165.35 1961.96,2200.15 1961.96,2214.84 1969.84,2222.72 DS2.1
NetDS3_2: DS3.2 R10.2 | length 48.6
  Top Layer w7.87: DS3.2 2071.24,2165.63 R10.2
NetF1_2: F1.2 L6.2 R6.1 | length 947.5
  Top Layer w7.87: L6.2 1303.15,2307.28 F1.2 1307.09,2326.97 1342.32,2362.2 1952.66,2362.2 1988.19,2326.68 1988.19,2262.45 1973.78,2248.03 1954.72,2248.03 1927.17,2220.47 R6.1 R6.1@1922.9,2220.15
NetF2_2: F2.2 L7.2 R10.1 | length 967.8
  Top Layer w7.87: R10.1 2068.28,2221.73 2041.99,2248.03 2018.39,2248.03 2001.97,2264.45 2001.97,2326.76 2037.41,2362.2 2677.56,2362.2 2693.31,2346.46 2699.21,2346.46 2714.96,2330.71 F2.2@2714.96,2324.8
  Top Layer w39.37: F2.2@2714.96,2324.8 2785.63,2324.8 L7.2
NetJ1_1: J1.1 L8.1 | length 73.5
  Top Layer w11.81: J1.1 1169.29,1620.11 L8.1@1180.91,1631.73
NetL3_1: L3.1 P5.2 | length 325.9
  Top Layer w19.68: L3.1 2870.87,1476.38 2893.67,1499.18 2893.67,1553.93 P5.2@2898.79,1559.06
  Top Layer w39.37: P5.2@2897.43,1554.91 P5.2 P5.2@2898.79,1559.06
NetR8_2: R8.2 R9a.1 R9b.1 U2.1 | length 452.6
  Top Layer w7.87: R8.2@1366.14,2185.24 1366.14,2181.3 1399.8,2147.64 1411.42,2147.64 R9a.1@1421.26,2137.8 ; R8.2 1370.08,2198.14 R8.2@1379.92,2207.99 ; R9b.1 R9a.1@1425.2,2133.86 ; R9a.1 R9a.1@1425.2,2133.86 ; U2.1 1516.73,2262.01 1545.08,2262.01 1559.06,2248.03 1559.06,2149.61 1543.31,2133.86 R9a.1@1425.2,2133.86
NetR11_2: R11.2 R12a.1 R12b.1 U3.1 | length 187.9
  Top Layer w19.68: U3.1 2517.05,2087.68 2597.52,2087.68 R11.2 R12a.1
NVR: L7.1 P2.1 P2.2 P2.3 P2.4 P2.5 P2.6
PVR: L6.1 P3.1 P3.2 P3.3 P3.4 P3.5 P3.6
pads on no net: J1.2 J1.3 J1.4 J1.6 J1.7 J1.8 J1.9 J1.10 J1.11 U1.7 U1.12 U1.20

## Polygon pours and split planes (outlines as drawn)
GND on Top Layer "Top Layer-GND" (solid, remove dead copper, pour order 86): 1064.96,1397.64 cw(c1064.96,1438.98) 1023.62,1438.98 1023.62,2347.01 cw(c1058.5,2347.01) 1058.5,2381.89 3025,2381.89 cw(c3025,2336.02) 3070.87,2336.02 3070.87,1437.01 cw(c3031.5,1437.01) 3031.5,1397.64
NetC12_2 on Top Layer "Top Layer-NetC12_2" (solid, remove dead copper, pour order 78): 2460.63,2208.75 2460.63,2120.93 2618.11,2120.93 2618.11,2210.83 2462.71,2210.83
NetC1_2 on Top Layer "Top Layer-NetC1_2" (solid, remove dead copper, pour order 76): 2541.06,1697.67 2480.31,1697.67 2480.31,1456.69 2125.98,1456.69 2125.98,1397.64 2544.29,1397.64
no net on Top Layer "Top Layer-No Net 7" (solid, remove dead copper, pour order 74): 2541.73,1635.04
NetC4_2 on Top Layer "Top Layer-NetC4_2" (solid, remove dead copper, pour order 2): 1407.48,2063.75 1444.88,2063.75 1444.88,2116.14 1543.31,2116.14 1543.31,1962.6 1407.48,1962.6
NetD2_1 on Top Layer "Top Layer-NetD2_1" (solid, pour order 16): 1980.32,1940.94 2068.08,1940.94 2104.02,1905 2424.68,1905 2472.44,1952.76 2472.44,2007.87 2070.87,2007.87 2047.24,1984.25 1980.32,1984.25
NetC1_2 on Top Layer "Top Layer-NetC2_2" (solid, pour order 12): 1980.32,1820.44 1980.32,1785.94 2022.16,1744.09 2051.18,1744.09 2051.18,1519.68 2500,1519.68 2125.98,1519.68 2125.98,1820.44
NetC1_2 on Top Layer "Top Layer-VIN" (solid, pour order 68): 1492.13,1523.5 1492.13,1397.64 2125.98,1397.64 2125.98,1477.36 2125.98,1523.5
-12V on Top Layer "Top Layer--12V" (solid, pour order 72): 2145.67,1858.27 2244.09,1858.27 2244.09,1482.28 2145.67,1482.28
no net on Top Layer "Top Layer-No Net" (solid, pour order 66): 2165.35,1397.64
no net on Top Layer "Top Layer-No Net 1" (solid, pour order 50): 2161.42,1397.64
CT1 on Top Layer "Top Layer-CT1" (solid, pour order 48): 1574.8,2036.25 1854.12,2036.25 1854.12,2352.17 1574.8,2352.17
CT2 on Top Layer "Top Layer-CT2" (solid, pour order 46): 2454.72,2048.82 2125.98,2048.82 2125.98,2352.17 2454.72,2352.17
no net on Top Layer "Top Layer-No Net 2" (solid, pour order 44): 2454.72,2352.17
no net on Top Layer "Top Layer-No Net 3" (solid, pour order 42): 2456.89,2256.96
NetC14_2 on Top Layer "Top Layer-NetC14_2" (solid, pour order 40): 2627.95,2217.38 2460.63,2217.38 2460.63,2352.36 2627.95,2352.36
NetC7_2 on Top Layer "Top Layer-NetC7_2" (solid, pour order 38): 1914.58,1946.06 1915.09,1946.58 1915.09,1996.26 1761.81,1996.26 1761.81,1976.57 1869.09,1976.57 1899.61,1946.06
NVR on Top Layer "Top Layer-NVR" (solid, pour order 30): 2755.91,2300 2814.96,2300 2824.8,2309.84 2824.8,2362.2 3041.34,2362.2 2962.6,2362.2 2962.6,1743.31 2850.19,1743.31 2824.8,1768.69 2824.8,2217.38 2798.09,2244.09 2755.91,2244.09
NetC11_2 on Top Layer "Top Layer-NetC11_2" (solid, pour order 34): 1397.64,2342.52 1462.4,2342.52 1462.93,2343.05 1466.54,2339.44 1466.54,2253.94 1539.37,2253.94 1539.37,2163.56 1399.43,2163.56 1397.64,2165.35
PVR on Top Layer "Top Layer-PVR" (solid, pour order 28): 1303.15,2204.72 1303.15,2116.14 1151.57,2116.14 1151.57,1747.24 1149.01,1744.68 1053.15,1744.68 1053.15,2352.36 1250,2352.36 1250,2204.72
+12V on Top Layer "Top Layer-+12V" (solid, pour order 26): 1736.22,1829.33 1736.22,1696.06 1633.86,1696.06 1633.86,1540.35 1539.37,1540.35 1539.37,1874.02 1584.65,1874.02 1584.65,1830.59
NetD1_2 on Top Layer "Top Layer-NetD1_2" (solid, pour order 24): 1870.08,1840.55 1818.5,1840.55 1818.5,1806.29 1751.97,1806.29 1751.97,1683.07 1683.66,1683.07 1683.66,1604.33 1889.76,1604.33 1889.76,1767.72 1918.84,1767.72 1918.84,1835.11 1921.26,1837.52
no net on Top Layer "Top Layer-No Net 4" (solid, pour order 20): 2141.73,1759.84
GND on Top Layer "Top Layer-GND 1" (solid, pour order 10): 1897.64,1590.55 ccw(c1897.64,1591.68) 1898.77,1591.68 1898.77,1759.84 1918.84,1759.84 1918.84,1889.37 1960.63,1889.37 1960.63,1692.91 2047.24,1692.91 2047.24,1562.99 1898.77,1562.99 1898.77,1561.02
no net on Top Layer "Top Layer-No Net 5" (solid, pour order 6): 1921.26,1837.52
no net on Top Layer "Top Layer-No Net 6" (solid, pour order 4): 1921.26,1854.33
GND on Bottom Layer "Bottom Layer-GND" (solid, remove dead copper, pour order 84): 1062.99,2381.89 ccw(c1062.99,2342.52) 1023.62,2342.52 1023.62,1437.01 ccw(c1062.99,1437.01) 1062.99,1397.64 3031.5,1397.64 ccw(c3031.5,1437.01) 3070.87,1437.01 3070.87,2342.52 ccw(c3031.5,2342.52) 3031.5,2381.89
GND on Bottom Layer "Bottom Layer-GND 1" (solid, pour order 62): 1653.54,1397.64
GND on Bottom Layer "Bottom Layer-GND 2" (solid, pour order 60): 1496.06,1397.64
GND on Bottom Layer "Bottom Layer-GND 3" (solid, pour order 58): 3169.29,1338.58
GND on Bottom Layer "Bottom Layer-GND 4" (solid, pour order 56): 3149.61,1338.58

## Silkscreen, mask and mechanical layers (free items; w line width, h text height)
Top Overlay:
  rectangle: 1799.21,2254.21 2222.44,2362.2
  lines w10: 1332.68,1732.28 1417.32,1732.28 1417.32,1870.08 1417.32,1549.05 ; 2342.52,1476.38 2342.52,1786.04 2373.23,1786.04 2373.23,1764.84 ; 2372.62,1786.04 cw(c2372.62,1785.43) 2373.23,1785.43 ; 2381.89,1532.68 2381.89,1732.28 2401.57,1732.28 2401.57,1712.6
  text "V-" at 2874.02,1702.76 h50
  text "GND" at 2952.76,1702.76 h50
  text "V+" at 1062.99,1690.16 h50
  text "GND" at 1151.57,1690.16 h50
Bottom Overlay:
  lines w10: 2500,1437.01 2853.54,1437.01 ; 2500,1673.23 2951.97,1673.23 ; 2687.01,1437.01 2853.54,1437.01 ; 2716.54,1673.23 2745.28,1673.23 cw(c2745.28,1623.23) 2795.28,1623.23 2795.28,1555.12 ; 2903.54,1515.75 2903.54,1487.01 ; 2903.54,1545.28 2903.54,1487.01 ; 3001.97,1555.12 3001.97,1623.23 ; 3001.97,1614.17 3001.97,1623.23 ; 2853.54,1437.01 ccw(c2853.54,1487.01) 2903.54,1487.01 ; 2853.54,1437.01 ccw(c2853.54,1487.01) 2903.54,1487.01 ; 2951.97,1673.23 cw(c2951.97,1623.23) 3001.97,1623.23 ; 2951.97,1673.23 cw(c2951.97,1623.23) 3001.97,1623.23
  text "BoardCompanion" at 2336.56,2263.75 h59.06
  text "Andreas Kellermann" at 2342.52,2204.72 h59.06
  text "rev. 2019-0" at 2336.56,2145.67 h59.06
  text "GND" at 2470.47,1653.54 h50
  text "2.7-5.5V VIN MAX" at 2470.47,1417.32 h50
Mechanical 2:
  lines w10: 1515.75,2381.89 3020.87,2381.89 cw(c3020.87,2331.89) 3070.87,2331.89 3070.87,1447.64 cw(c3020.87,1447.64) 3020.87,1397.64 1073.62,1397.64 cw(c1073.62,1447.64) 1023.62,1447.64 1023.62,2331.89 cw(c1073.62,2331.89) 1073.62,2381.89 1929.13,2381.89

## Text inside footprints (layer, text, board x,y; h text height)
J1: Mechanical 1 "PCB EDGE" at 937.01,1395.67 h11.81